# Altium PCB Main.PcbDoc (part 3 of 4)
Units mm, origin at the board's own origin, x right, y up, seen from the top; angles counter-clockwise.
Board outline 180 x 80 mm, 4 copper layers (L1_TOP, L2_GND, L3_PWR, L4_BOT), stack 1.447 mm thick; 236 components, 173 nets, 792 pads, 473 vias.
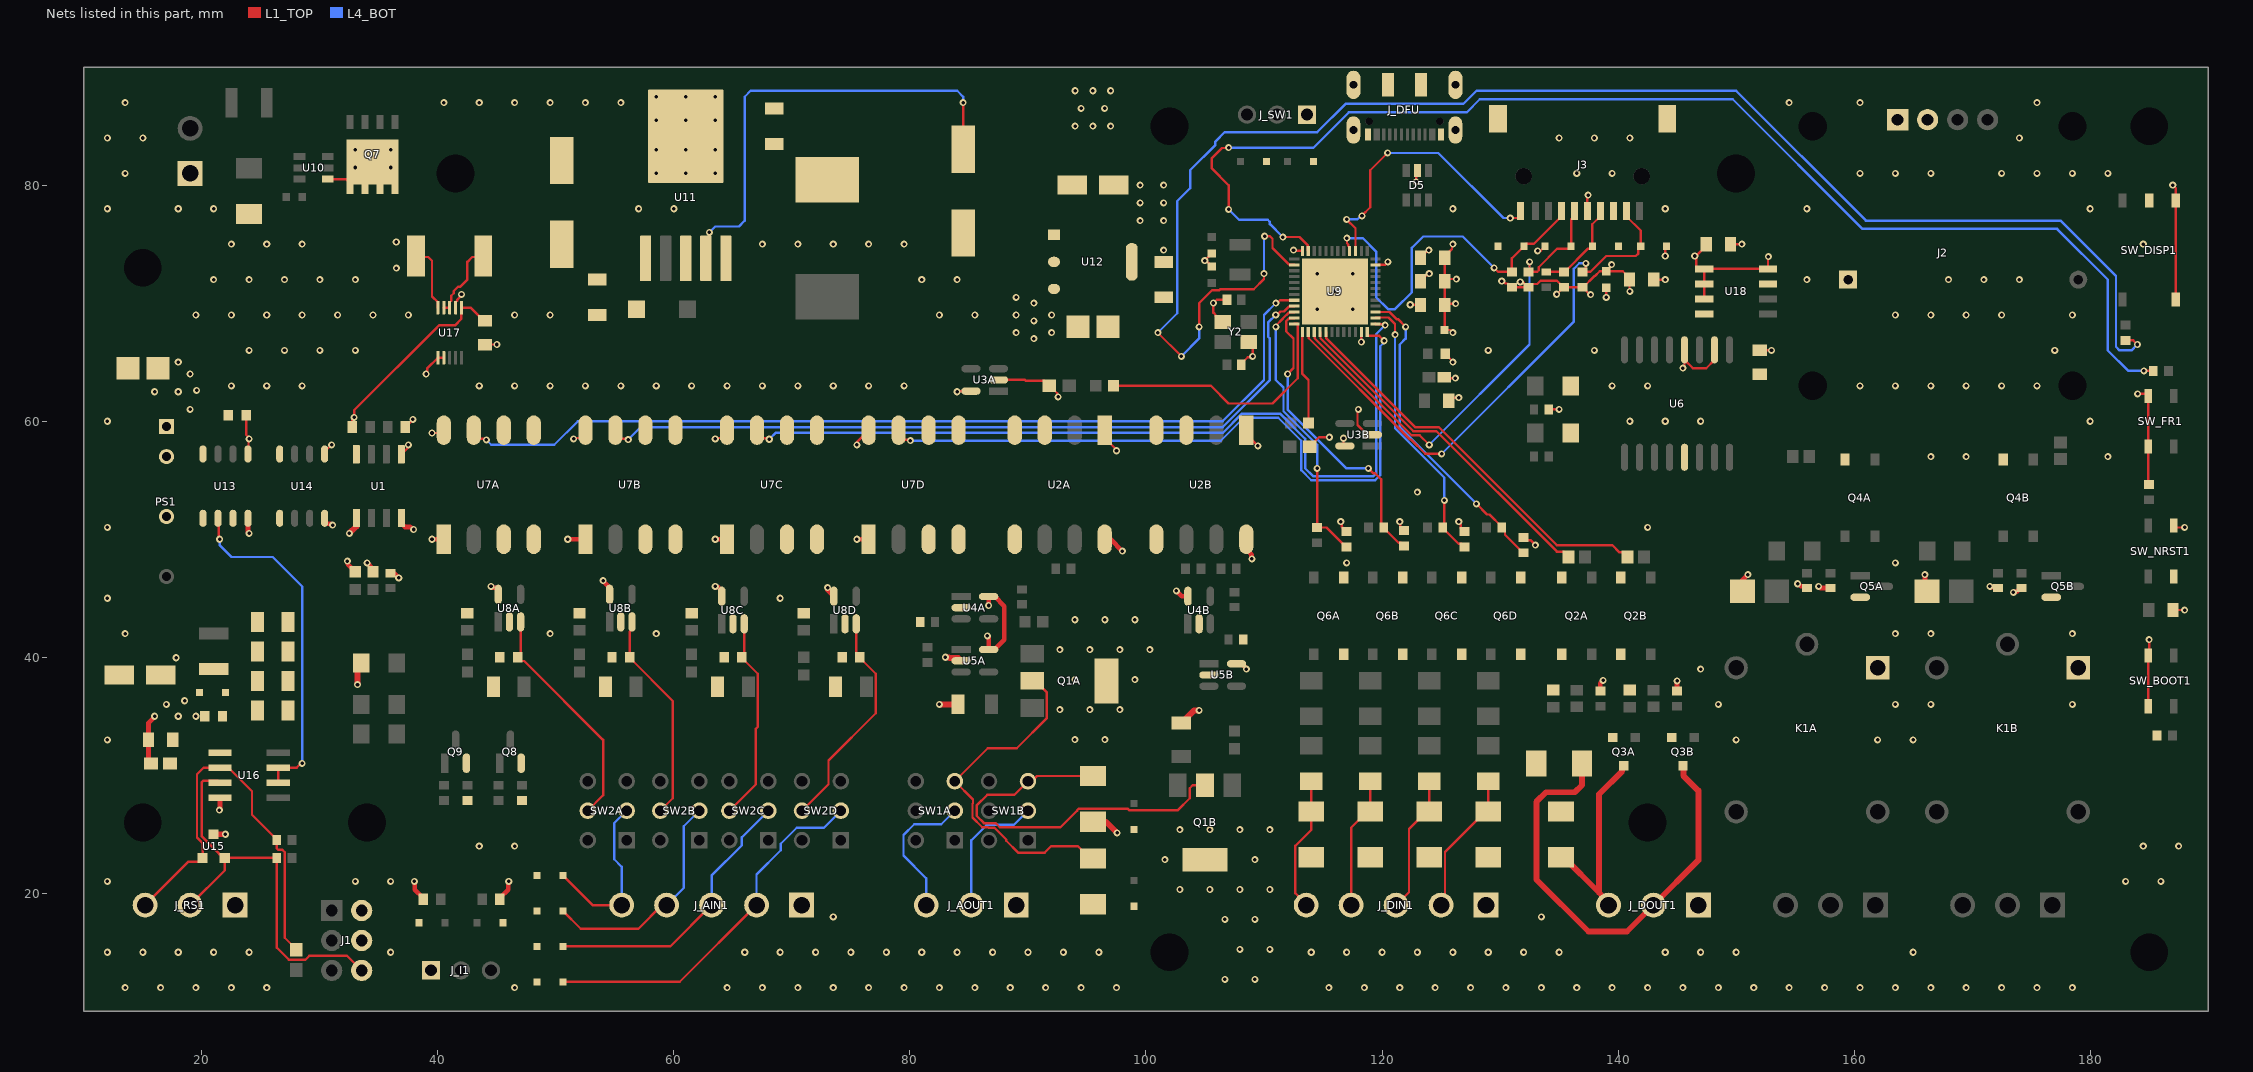
[diagram p4: the nets of this part, all layers, seen from the top]

## Via types
v1: diameter 0.6, hole 0.3, L1_TOP to L4_BOT, 473 vias

## Nets (pads, with @x,y where several pads share a name; then routed paths per layer and width w, separated by ;. In a path a pad name is that pad's centre, name@x,y a point inside that pad or via, vN(x,y) a via of type N, cw(c..) or ccw(c..) an arc to the next point about the centre after c; other vN are vias at no path point) (continued)
AIN_SENSEA: (continued)
  L1_TOP w0.2: U8A.3@47.009,43 47.009,40.259 C4A.1@46.75,40 46.75,39.988 47.05,39.688 47.312,39.688 54,33 54,28.3 SW2A.5@52.7,27
AIN_SENSEB: C4B.1 SW2B.5 U8B.3 | length 18
  L1_TOP w0.2: U8B.3@56.45,43 56.45,42.377 56.25,42.177 C4B.1@56.25,40 56.25,39.95 59.904,36.296 59.904,28.054 SW2B.5@58.85,27
AIN_SENSEC: C4C.1 SW2C.5 U8C.3 | length 17.5
  L1_TOP w0.2: SW2C.5@64.7,27 66.946,29.246 66.946,33.935 67.1,34.089 67.1,38.6 65.75,39.95 C4C.1@65.75,40 65.95,40.2 U8C.3@65.95,42.834
AIN_SENSED: C4D.1 SW2D.5 U8D.3 | length 19.1
  L1_TOP w0.2: SW2D.5@70.85,27 73.096,29.246 73.096,31.251 77.1,35.255 77.1,38.6 75.75,39.95 C4D.1@75.75,40 75.45,40.3 U8D.3@75.45,42.834
AOUT1: R5A.1 U9.12 | length 22
  L1_TOP w0.2: R5A.1@97.25,63 105.5,63 107,61.5 110.73,61.5 112.865,63.635 112.865,67.95 112.86,67.955 112.86,68.215 112.825,68.25 U9.12@112.565,68.25
AOUT1_FIELD: J_AOUT1.3 SW1A.2 | length 11.9
  L4_BOT w0.2: J_AOUT1.3@81.38,19 81.38,21.258 79.446,23.192 79.446,24.937 80.363,25.853 82.653,25.853 SW1A.2@83.8,27
AOUT2: R5B.1 U9.13 | length 7.9
  L1_TOP w0.2: U9.13@113.25,67.565 113.25,64.007 113.767,63.49 R5B.1@113.767,59.853
AOUT2_FIELD: J_AOUT1.2 SW1B.2 | length 11.3
  L4_BOT w0.2: J_AOUT1.2@85.19,19 85.19,24.481 86.517,25.807 88.807,25.807 SW1B.2@90,27
AOUT_CURRENTA: D2A.2 Q1A.2 Q1A.4 SW1A.3 | length 29.7
  L1_TOP w0.2: Q1A.2@90.35,38 90.6,38 91.6,37 91.6,34.846 89.042,32.288 86.588,32.288 SW1A.3@83.8,29.5 85.343,27.957 85.343,27.628 85.296,27.582 85.296,26.418 86.118,25.596 86.613,25.596 86.655,25.554 87.156,25.554 88.155,24.555 88.155,24.445 89.153,23.446 91.424,23.446 91.956,23.978 94.227,23.978 95.268,22.937 D2A.2@95.5,22.937
  other v1: 93.98,33.02 96.52,33.02 92.71,35.56 95.25,35.56 97.79,35.56 93.98,38.1 99.06,38.1 92.71,40.64 95.25,40.64 97.79,40.64 100.33,40.64 93.98,43.18 96.52,43.18 99.06,43.18
AOUT_CURRENTB: D2B.2 Q1B.2 Q1B.4 SW1B.3 | length 33.6
  L1_TOP w0.2: D2B.2@95.5,29.937 90.762,29.937 90.325,29.5 SW1B.3@90,29.5 88.853,28.353 86.563,28.353 85.646,27.437 85.646,26.563 86.263,25.946 87.259,25.946 87.609,25.596 92.757,25.596 94.16,26.999 94.16,27.024 94.306,27.17 98.445,27.17 98.565,27.05 102.704,27.05 103.7,28.046 103.7,28.9 103.95,29.15 Q1B.2@105,29.15
  other v1: 106.68,12.7 109.22,12.7 107.95,15.24 110.49,15.24 106.68,17.78 109.22,17.78 102.87,20.32 105.41,20.32 107.95,20.32 110.49,20.32 101.6,22.86 109.22,22.86 102.87,25.4 105.41,25.4 107.95,25.4 110.49,25.4
B: J1.6 J_RS1.2 R24.2 U15.2 U16.7 | length 34.5
  L1_TOP w0.2: J_RS1.2@19,19 21.94,21.94 U15.2@21.94,23 ; U16.7@21.536,29.365 21.37,29.532 20.546,29.532 20.528,29.549 20.117,29.549 20,29.432 20,24.806 21.486,23.32 21.62,23.32 U15.2@21.94,23 ; J1.6@33.54,13.46 32.286,14.714 29.112,14.714 28.773,14.375 27.371,14.375 26.35,15.396 R24.2@26.35,23 U15.2@21.94,23
BTN1: R27.2 U9.2 | length 134
  L1_TOP w0.2: v1(101,67.5) v1(103,65.5) ; v1(104.504,68) 104.5,68.004 104.5,70 105.613,71.113 106.205,71.113 106.275,71.183 109.125,71.183 109.997,72.055 109.997,72.497 v1(110,72.5) ; v1(110.048,75.676) 110.499,75.676 110.717,75.458 110.717,74.68 112.111,73.285 112.53,73.285 U9.2@112.565,73.25 ; R27.2@183,66.85 183.65,66.85 v1(184,66.5)
  L4_BOT w0.2: v1(101,67.5) 102.652,69.152 102.652,78.652 103.741,79.741 103.741,81.259 105.877,83.394 105.877,83.7 106.677,84.5 114.517,84.5 116.904,86.887 126.887,86.887 128,88 150,88 161,77 177.495,77 182.198,72.297 182.198,66.302 182.5,66 183.5,66 v1(184,66.5) ; v1(103,65.5) 104.504,67.004 v1(104.504,68) ; v1(110,72.5) 110,75.629 v1(110.048,75.676)
BTN2: R28.2 U9.47 | length 108.4
  L1_TOP w0.2: v1(107,77.956) 107,80 105.583,81.417 105.583,82.307 106.427,83.152 106.976,83.152 v1(107.002,83.177) ; v1(111.594,75.607) 112.997,75.607 113.715,74.889 113.715,74.47 U9.47@113.75,74.435 ; v1(184.562,64.261) 185.324,64.261 R28.2@185.35,64.236
  L4_BOT w0.2: v1(107,77.956) 107.891,77.065 110.318,77.065 110.5,76.883 110.5,76.701 v1(111.594,75.607) ; v1(107.002,83.177) 114.183,83.177 117.194,86.187 127.187,86.187 128.281,87.281 149.719,87.281 160.7,76.3 177.205,76.3 181.498,72.007 181.498,66.003 183.239,64.261 v1(184.562,64.261)
CARD_DETECT: J3.CD U9.39 | length 24.7
  L1_TOP w0.2: v1(116.993,77.102) 117.75,76.346 U9.39@117.75,74.435 ; v1(118.301,77.394) 118.301,77.431 119,78.13 119,81.261 v1(120.481,82.742) ; v1(130.864,77.217) 131.55,77.217 131.75,77.417 J3.CD@131.75,77.82
  L4_BOT w0.2: v1(116.993,77.102) 117.901,77.102 118.193,77.394 v1(118.301,77.394) ; v1(120.481,82.742) 120.492,82.731 124.769,82.731 130.283,77.217 v1(130.864,77.217)
CLK: D15.1 J3.P5 R31.2 R33.2 | length 8.1
  L1_TOP w0.2: R33.2@133.93,72.65 135.48,72.65 137.455,74.625 137.62,74.625 D15.1@137.82,74.825 137.82,76.69 138.5,77.37 J3.P5@138.5,77.82
CMD: D14.1 J3.P3 R30.2 U9.15 | length 41.7
  L1_TOP w0.2: U9.15@114.25,67.565 114.285,67.53 114.285,67.03 122.515,58.8 123.2,58.8 v1(124,58) ; v1(132.5,73.5) 132.5,72.73 R30.2@132.42,72.65 133.145,72.65 133.28,72.785 133.28,73.054 134.852,74.625 135.82,74.625 D14.1@136.02,74.825 136.02,77.09 136.3,77.37 J3.P3@136.3,77.82
  L4_BOT w0.2: v1(124,58) 132.5,66.5 v1(132.5,73.5)
DAT0: D16.1 J3.P7 R32.2 U9.14 | length 47.8
  L1_TOP w0.2: U9.14@113.75,67.565 113.785,67.53 113.785,67.035 122.37,58.45 122.446,58.45 123.658,57.239 v1(125.054,57.239) ; v1(137.271,73.38) 137.271,72.921 R32.2@137,72.65 137.65,72.65 139,74 141.5,74 141.72,74.22 141.72,74.625 D16.1@141.92,74.825 141.92,76.15 140.7,77.37 J3.P7@140.7,77.82
  L4_BOT w0.2: v1(125.054,57.239) 136.254,68.439 136.254,72.925 136.709,73.38 v1(137.271,73.38)
DAT3: D13.1 J3.P2 R29.2 U9.40 | length 33.2
  L1_TOP w0.2: v1(117.014,75.514) 117.026,75.502 117.026,75.078 117.135,74.969 117.135,74.845 117.25,74.73 U9.40@117.25,74.435 ; v1(129.5,73) 129.85,72.65 R29.2@131,72.65 131,73.805 D13.1@132.02,74.825 132.22,75.025 132.855,75.025 135.2,77.37 J3.P2@135.2,77.82
  L4_BOT w0.2: v1(117.014,75.514) 117.028,75.5 118.383,75.5 119.5,74.383 119.5,70.5 120.5,69.5 121.104,69.5 122.521,70.917 122.521,74.684 123.491,75.654 126.846,75.654 v1(129.5,73)
DIN1: R36A.2 R39A.2 U9.10 | length 23.8
  L1_TOP w0.2: v1(111,68) 111,68.083 111.577,68.659 111.577,68.68 112.111,69.215 112.53,69.215 U9.10@112.565,69.25 ; v1(114.504,56) 114.5,55.996 114.5,51.021 R39A.2@114.479,51 115.3,51 116.95,49.35 R36A.2@117,49.35
  L4_BOT w0.2: v1(111,68) 111,63.5 111.65,62.85 111.65,60.85 114.5,58 114.5,56.004 v1(114.504,56)
DIN1_FIELD: D18A.1 J_DIN1.5 R37A.1 | length 11.4
  L1_TOP w0.2: J_DIN1.5@113.57,19 113.57,19.089 112.66,19.999 112.66,24.024 114,25.364 D18A.1@114,26.937 R37A.1@114,29.5
DIN2: R36B.2 R39B.2 U9.11 | length 25.4
  L1_TOP w0.2: v1(112,64) 112.5,64.5 112.5,67 111.885,67.615 111.885,68.489 112.111,68.715 112.53,68.715 U9.11@112.565,68.75 ; v1(118.846,56) 118.859,56 119.277,55.582 119.418,55.582 119.925,55.075 R39B.2@119.925,51.225 ; R39B.2@120.15,51 120.15,50.95 121.398,49.702 121.598,49.702 R36B.2@121.873,49.427
  L4_BOT w0.2: v1(112,64) 112,61 117,56 v1(118.846,56)
DIN2_FIELD: D18B.1 J_DIN1.4 R37B.1 | length 11.3
  L1_TOP w0.2: J_DIN1.4@117.38,19 117.38,25.55 118.768,26.937 D18B.1@119,26.937 ; D18B.1@119,26.937 R37B.1@119,29.5
DIN3: R36C.2 R39C.2 U9.26 | length 23.5
  L1_TOP w0.2: U9.26@119.435,68.75 119.47,68.785 119.989,68.785 119.998,68.794 120.54,68.794 121.103,68.231 v1(121.103,67.343) ; R39C.2@125.15,50.95 126.475,49.625 126.725,49.625 R36C.2@127,49.35 ; R39C.2@125.15,51 125.285,51.135 v1(125.285,53.291)
  L4_BOT w0.2: v1(121.103,67.343) 121.103,59.397 125.285,55.215 v1(125.285,53.291)
DIN3_FIELD: D18C.1 J_DIN1.3 R37C.1 | length 11.8
  L1_TOP w0.2: J_DIN1.3@121.19,19 122.282,20.092 122.282,25.451 123.768,26.937 D18C.1@124,26.937 R37C.1@124,29.5
DIN4: R36D.2 R39D.2 U9.27 | length 26.9
  L1_TOP w0.2: U9.27@119.435,69.25 120.642,69.25 121.238,68.654 121.346,68.654 v1(122,68) ; v1(128,53) 128.903,52.097 129.103,52.097 130.15,51.05 R39D.2@130.15,51 130.425,50.725 130.425,50.375 131.95,48.85 R36D.2@132,48.85
  L4_BOT w0.2: v1(122,68) 122,67 121.5,66.5 121.5,59.5 v1(128,53)
DIN4_FIELD: D18D.1 J_DIN1.2 R37D.1 | length 12.3
  L1_TOP w0.2: J_DIN1.2@125,19 125.34,19.34 125.34,23.51 128.768,26.937 D18D.1@129,26.937 R37D.1@129,29.5
DIR: U13.6 U16.2 U16.3 | length 29.2
  L1_TOP w0.2: U13.6@21.365,51.775 21.432,51.708 21.432,50.067 v1(21.5,50) ; U16.2@26.464,29.365 U16.3@26.464,30.635 28.027,30.635 28.392,31 v1(28.5,31)
  L4_BOT w0.2: v1(21.5,50) 21.5,49.5 22.5,48.5 26,48.5 28.5,46 v1(28.5,31)
DOUT1: R12A.1 U9.16 | length 29.3
  L1_TOP w0.2: U9.16@114.75,67.565 114.785,67.53 114.785,67.025 122.66,59.15 124.619,59.15 134.819,48.95 135.4,48.95 135.8,48.55 R12A.1@135.8,48.5
DOUT1_FIELD: D3A.1 J_DOUT1.3 Q3A.3 | length 17.5
  L1_TOP w0.5: D3A.1@135.165,23.063 135.397,23.063 138.392,20.068 ; J_DOUT1.3@139.19,19 139.19,19.27 138.392,20.068 ; Q3A.3@140.5,30.8 140.35,30.65 140.35,30.35 138.392,28.392 138.392,20.068
DOUT2: R12B.1 U9.17 | length 33.7
  L1_TOP w0.2: U9.17@115.251,67.564 115.285,67.53 115.285,67.02 122.805,59.5 124.812,59.5 134.812,49.5 139.5,49.5 140.117,48.883 140.417,48.883 R12B.1@140.8,48.5
DOUT2_FIELD: D3B.1 J_DOUT1.2 Q3B.3 | length 39.5
  L1_TOP w0.5: D3B.1@136.937,31 136.937,29.16 136.338,28.56 133.892,28.56 133.08,27.748 133.08,21.168 137.492,16.756 140.756,16.756 J_DOUT1.2@143,19 146.803,22.803 146.803,28.697 145.53,29.97 145.53,30.77 Q3B.3@145.5,30.8
GND: BT1.1 C2.2 C3.1 C5.2 C6.2 C7.2 C8.1 C9.2 C10.2 C11.2 C12.2 C13.2 C14.2 C15.1 C17.2 C19.1 C20.1 C21.1 C22.1 C23.1 C24.1 C25.2 C28.1 C29.1 C30.1 C31.2 D5.2 D6.2 D7.2 D8.1 D9.1 D10.2 D12.2 D13.2 D14.2 D15.2 D16.2 J2.1 J3.G1 J3.G2 J3.P6 J-SUPPLY1.1 J_DFU.1 J_DFU.12 J_DFU.S1 J_DFU.S2 J_DFU.S3 J_DFU.S4 J_DFU.S5 J_DFU.S6 J_SW1.1 PS1.2 Q2A.2 Q2B.2 Q4A.2 Q4B.2 Q6A.3 Q6B.3 Q6C.3 Q6D.3 R6A.2 R6B.2 R17.1 SW_DISP1.5 SW_NRST1.3 SW_NRST1.4 U1.4 U2A.3 U2A.4 U2B.3 U2B.4 U3A.2 U3B.2 U6.13 U7A.5 U7A.6 U7B.5 U7B.6 U7C.5 U7C.6 U7D.5 U7D.6 U9.49 U11.3 U11.5 U11.6 U12.1 U13.4 U14.4 U17.1 U17.2 U17.7 U18.4 U18.7 Y2.2 Y2.4 | length 36.2
  L1_TOP w0.2: v1(39,64) 39.049,63.951 39.085,63.951 39.085,64.46 U17.1@40,65.375 U17.2@40.5,65.375 ; U17.7@41.5,69.625 41.5,70.075 41.625,70.2 41.625,70.28 42,70.655 v1(42,70.754) ; C28.1@44,66.475 44.025,66.5 v1(45,66.5) ; U3A.2@87.5,63.5 89.727,63.5 89.802,63.425 91.375,63.425 R6A.2@91.8,63 91.85,63 92.476,62.374 92.476,62.141 v1(92.553,62.065) ; C6.2@105.582,73.113 105.086,73.609 v1(104.978,73.609) C5.2@105.582,74.213 ; Y2.4@106.492,68.421 106.392,68.421 105.892,68.921 105.892,69.021 105.711,69.202 v1(105.711,70.017) 105.99,70.296 C7.2@106.873,70.296 ; C8.1@108.073,64.796 108.073,64.871 108.623,65.421 108.956,65.421 v1(109.033,65.498) 109.033,66.38 Y2.2@108.692,66.721 ; R6B.2@113.867,57.853 114.654,58.639 v1(115.538,58.639) ; v1(118,61) 117.923,60.923 117.923,60.686 117.92,60.683 117.92,59.692 118.76,58.853 U3B.2@119.183,58.853 ; v1(122.394,69.866) 123.259,69.866 C11.2@123.268,69.857 ; v1(122.889,80.278) 122.889,81.139 D5.2@123,81.25 ; C10.2@123.268,71.857 123.911,72.5 v1(124,72.5) ; C9.2@123.268,73.857 123.903,74.492 v1(123.975,74.492) ; C13.2@125.264,63.73 125.341,63.652 v1(126.213,63.652) ; C12.2@125.373,65.73 125.373,65.68 126,65.053 v1(126,65) ; C14.2@125.648,61.73 125.918,62 v1(126.5,62) ; v1(133.183,74.441) 133.436,74.441 D14.2@133.82,74.825 ; v1(139,70.5) C30.1@139,71.3 ; C31.2@143.025,72 v1(144,72) ; v1(144,74) 144,74.705 D16.2@144.12,74.825 ; C29.1@149.525,75 v1(150.5,75) ; C15.1@187.025,44 v1(188,44) ; SW_NRST1.4@187.075,51.15 187.225,51 v1(188,51)
  other v1: 117,48 142.5,51 123,54 166.5,57 169.5,57 181.5,57 12,60 141,60 144,60 147,60 180,60 22.5,63 25.5,63 28.5,63 43.5,63 46.5,63 49.5,63 52.5,63 55.5,63 58.5,63 61.5,63 64.5,63 67.5,63 70.5,63 73.5,63 76.5,63 79.5,63 139.5,63 142.5,63 160.5,63 163.5,63 166.5,63 169.5,63 172.5,63 175.5,63 24,66 27,66 30,66 33,66 129,66 138,66 177,66 19.5,69 22.5,69 25.5,69 28.5,69 31.5,69 34.5,69 37.5,69 46.5,69 49.5,69 82.5,69 85.5,69 163.5,69 166.5,69 169.5,69 172.5,69 178.5,69 114.5,69.5 117.5,69.5 116,71 21,72 24,72 27,72 30,72 33,72 81,72 84,72 156,72 168,72 171,72 174,72 114.5,72.5 117.5,72.5 22.5,75 25.5,75 28.5,75 67.5,75 70.5,75 73.5,75 76.5,75 79.5,75 184.5,75 12,78 18,78 21,78 57,78 60,78 126,78 144,78 156,78 180,78 13.5,81 58.5,81 61,81 63.5,81 136.5,81 139.5,81 160.5,81 163.5,81 166.5,81 172.5,81 175.5,81 178.5,81 181.5,81 58.5,83 61,83 63.5,83 12,84 15,84 135,84 138,84 141,84 174,84 58.5,85.5 61,85.5 63.5,85.5 13.5,87 40.5,87 43.5,87 46.5,87 49.5,87 52.5,87 55.5,87 154.5,87 160.5,87 175.5,87 58.5,87.5 61,87.5 63.5,87.5